# Altium PCB External_Board_1 mode.PcbDoc
Units mm, origin at the board's own origin, x right, y up, seen from the top; angles counter-clockwise.
Board outline 60.32 x 35.26 mm, 2 copper layers (Top Layer, Bottom Layer); 16 components, 8 nets, 69 pads, 1 vias.
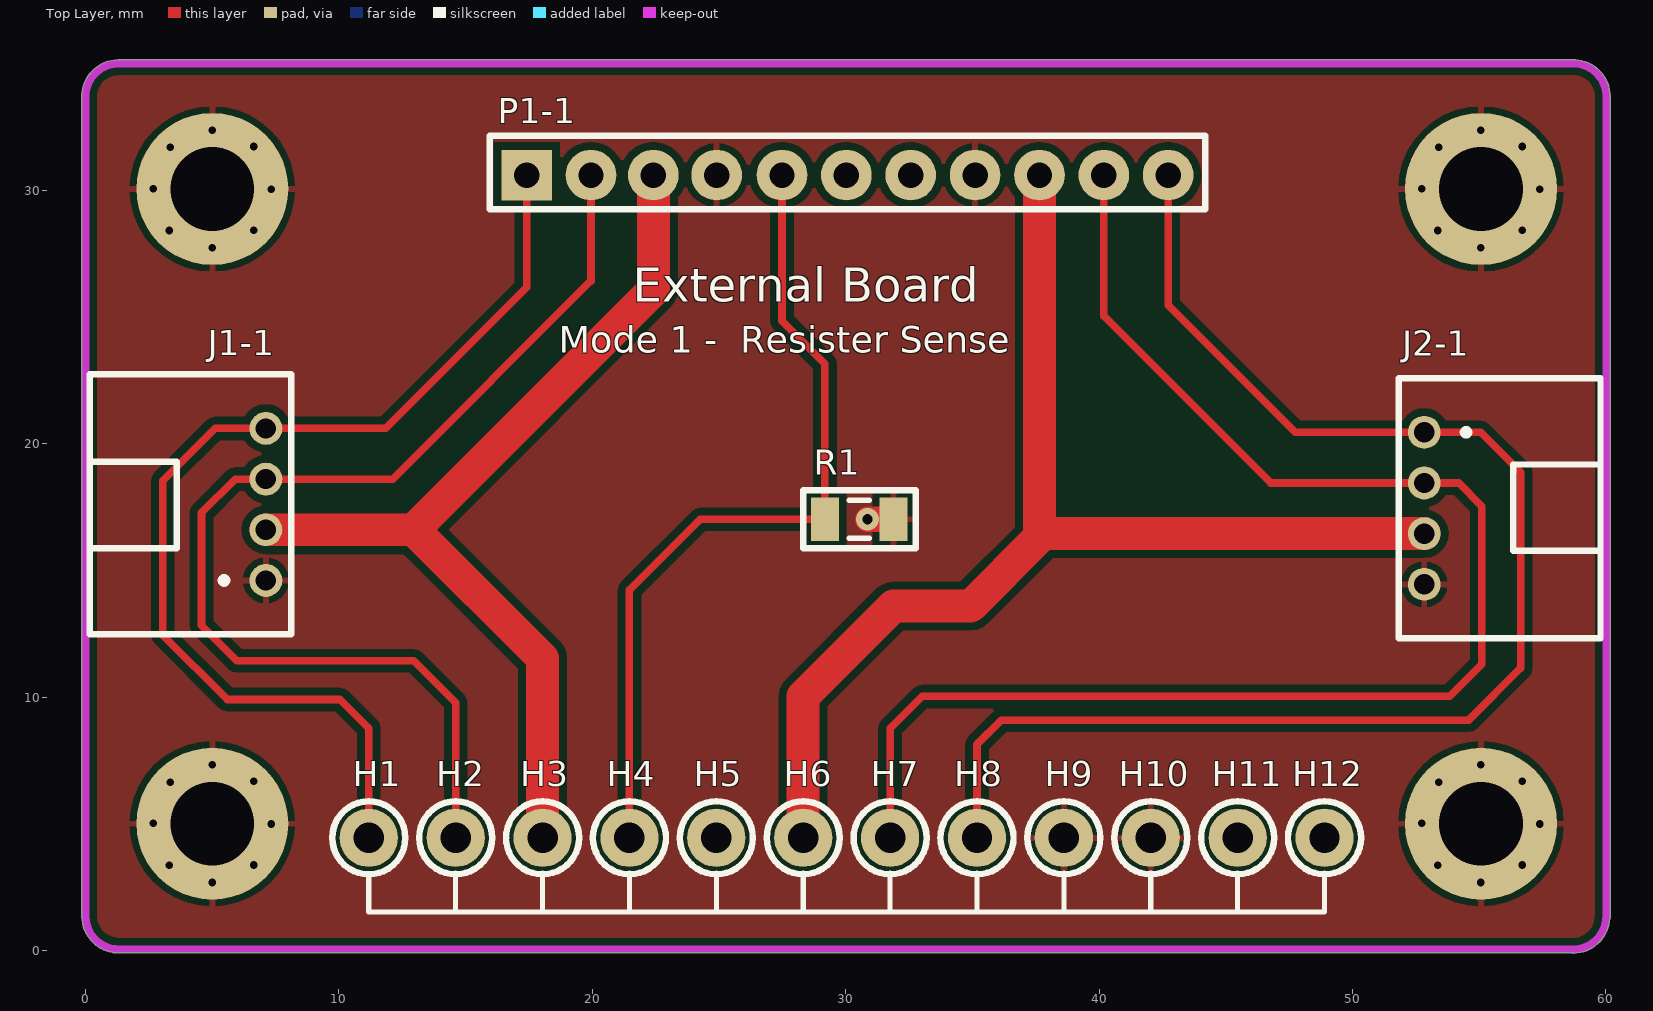
[diagram p0: Top Layer view]
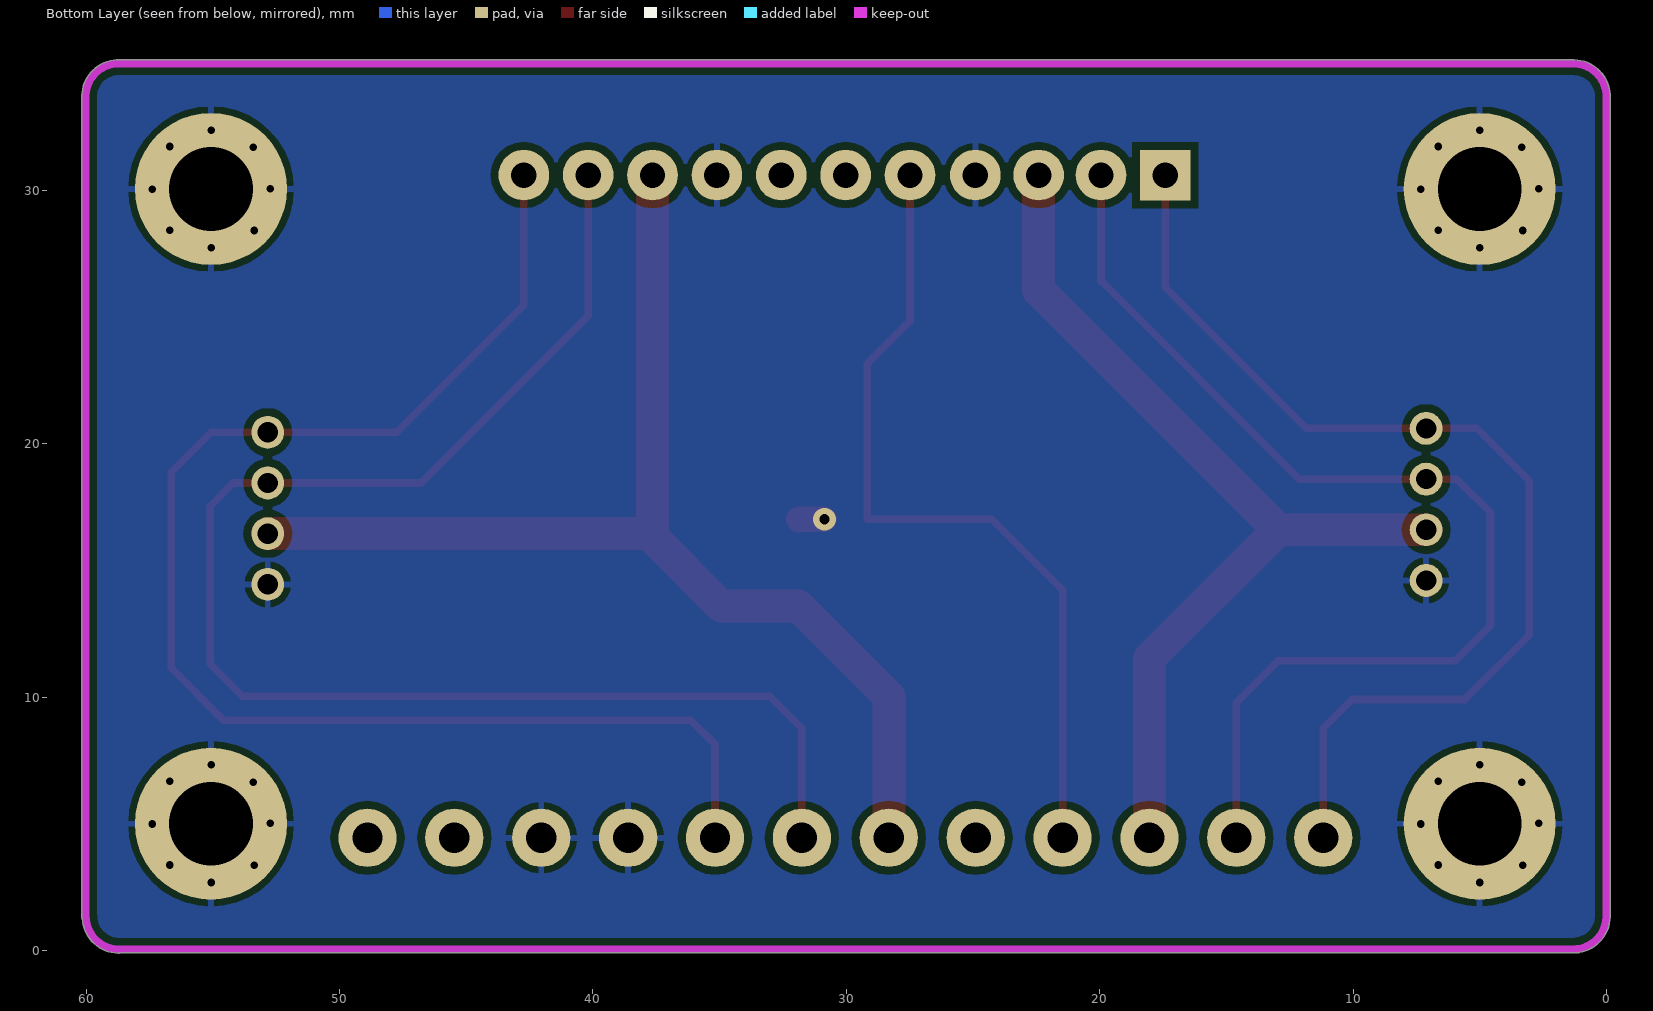
[diagram p1: Bottom Layer view, seen from below]
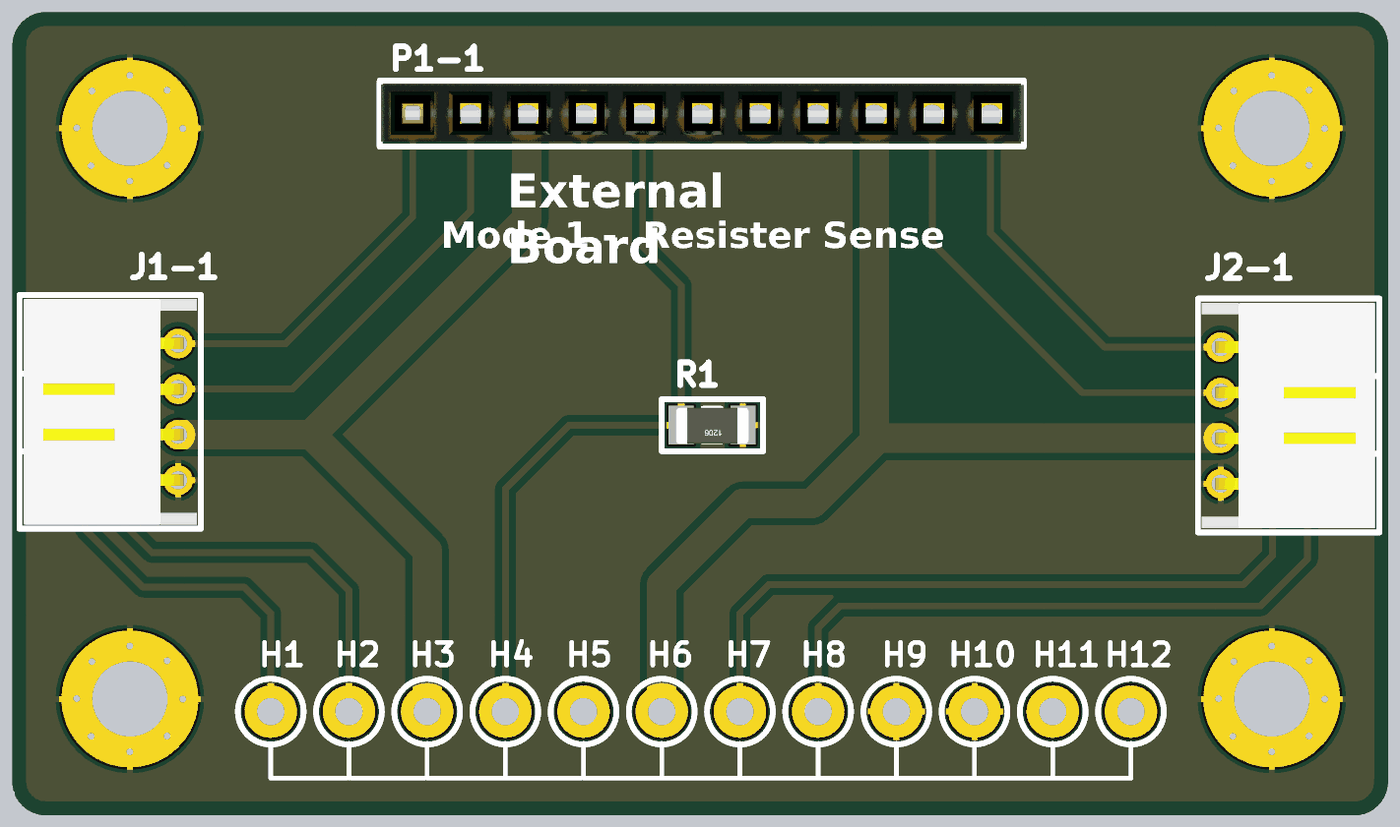
[diagram p2: 3D render of the assembled board from above, using the file's embedded part models]

## Layer stack, top to bottom
Top Solder: solder mask 0.0102, Solder Resist, Dk 3.5
Top Layer: signal copper 0.0356
Dielectric 1: dielectric 0.32, FR-4, Dk 4.8
Bottom Layer: signal copper 0.0356
Bottom Solder: solder mask 0.0102, Solder Resist, Dk 3.5

## Board outline
1.07,-0.079 ccw(c1.143,0.052) 1.143,-0.098 1.268,-0.098 ccw(c1.308,1.36) 1.347,-0.098 58.688,-0.098 ccw(c58.738,0.044) 58.742,-0.107 ccw(c58.7,1.351) 60.155,1.256 ccw(c60.019,1.319) 60.169,1.319 60.169,33.73 ccw(c60.019,33.73) 60.169,33.734 ccw(c58.711,33.693) 58.672,35.15 1.27,35.15 ccw(c1.27,35) 1.266,35.15 ccw(c1.308,33.692) -0.15,33.653 -0.15,1.322 ccw(c0,1.322) -0.15,1.318 ccw(c1.308,1.36)

## Design rules (kind name [scope] priority, off if disabled: settings)
Clearance Clearance_1 [inpoly] p1: gap=0.3
Clearance [All] p2: gap=0.203
HoleSize [All] p1: absolutevalues=TRUE maxlimit=8 minlimit=0.2 maxpercent=80.000 minpercent=20.000
HoleToHoleClearance [All] p1: gap=0.1 allowstackedmicrovias=TRUE
MinimumSolderMaskSliver [All] p1: minsoldermaskwidth=0.01
PlaneConnect [All] p1: planeconnectstyle=Relief reliefexpansion=0.254 reliefentries=4 reliefconductorwidth=0.254 reliefairgap=0.254
PolygonConnect PolygonConnect_1 [IsVia] p1: connectstyle=Direct reliefconductorwidth=0.254 reliefentries=4 polygonreliefangle="90 Angle" airgapwidth=0.254
PolygonConnect [All] p2: connectstyle=Relief reliefconductorwidth=0.254 reliefentries=4 polygonreliefangle="90 Angle" airgapwidth=0.254
RoutingVias [All] p1: holewidth=0.3 width=0.5 viastyle="Through Hole" minholewidth=0.3 minwidth=0.5 maxholewidth=0.711 maxwidth=1.27
SilkToSilkClearance [All] p1: silktosilkclearance=0.01
SilkToSolderMaskClearance [IsPad] p1: minsilkscreentomaskgap=0 clearancetoexposedcopper=TRUE
SolderMaskExpansion isvia [isvia] p1: expansion=0 soldermaskfromhole=TRUE
SolderMaskExpansion [All] p2: expansion=0.102
Width [All] p1: maxlimit=3 minlimit=0.3 preferedwidth=0.3
24 further rules are at their usual default settings.

## Components (designator, comment, footprint, x,y, rotation, side; value= is the part's Value field where it differs from the comment)
H1 "TP_HOLE" TestHole 11.176,4.445 r0 top
H2 "TP_HOLE" TestHole 14.605,4.445 r0 top
H3 "TP_HOLE" TestHole 18.034,4.445 r0 top
H4 "TP_HOLE" TestHole 21.463,4.445 r0 top
H5 "TP_HOLE" TestHole 24.892,4.445 r0 top
H6 "TP_HOLE" TestHole 28.321,4.445 r0 top
H7 "TP_HOLE" TestHole 31.75,4.445 r0 top
H8 "TP_HOLE" TestHole 35.179,4.445 r0 top
H9 "TP_HOLE" TestHole 38.608,4.445 r0 top
H10 "TP_HOLE" TestHole 42.037,4.445 r0 top
H11 "TP_HOLE" TestHole 45.466,4.445 r0 top
H12 "TP_HOLE" TestHole 48.895,4.445 r0 top
J1-1 "S4B-PH-K-S" CON4 7.112,14.605 r90 top
J2-1 "S4B-PH-K-S" CON4 52.832,20.447 r270 top locked
P1-1 "Header11" CON11 17.399,30.607 r0 top
R1 "PTFT1206L1501JV" PTFT1206L1501JV 31.877,17.018 r180 top

## Footprints (in the part's own frame and the unit in brackets; to place one, negate y for a bottom-side part, rotate by r counter-clockwise, add the part's x,y. Pads: shape width x height; smd on the part's side, far side on the other; paste and mask are expansions set on the pad)
CON4 [mm] "CONN HEADER PH SIDE 4POS 2MM"
  round 1.3 hole 0.8: 1(-0.002,-0.002) 2(1.998,-0.002) 3(3.998,-0.002) 4(5.998,-0.002)
  silkscreen extent -2.13,-1 8.13,6.95, body extent -1.95,-0.83 7.95,6.77, height 4.8
CON11 [mm] "CONN HEADR FMALE 11POS .1\" DL AU"
  rect 2x2 hole 1: 1(0.005,-0.007)
  round 2 hole 1: 2(2.545,-0.007) 3(5.005,-0.007) 4(7.505,-0.007) 5(10.085,-0.007) 6(12.625,-0.007) 7(15.165,-0.007) 8(17.705,-0.007) 9(20.245,-0.007) 10(22.785,-0.007) 11(25.325,-0.007)
  silkscreen extent -1.44,-1.36 26.8,1.54, body extent -1.4,-1.14 26.8,1.36, height 8.5
PTFT1206L1501JV [mm] "THERMISTOR PTC 1.5K OHM 5% 1206"
  rect 1.1x1.7 smd: 1(0,0) 2(2.7,0)
  silkscreen extent 0.95,-0.75 1.75,0.75, body extent -0.26,-0.78 2.94,0.82, height 1
TestHole [mm] "pad of test through hole"
  round 2.3 hole 1.2: 1(0,0)
  silkscreen extent -1.44,-1.44 1.44,1.44

## Part data
H1 H2 H3 H4 H5 H6 H7 H8 H9 H10 H11 H12: "TEST POINT HOLE"
J1-1 J2-1: library part "S4B-PH-K-S (LF)(SN)", "JST (JAPAN SOLDERLESS TERMINALS) - S4B-PH-K-S (LF)(SN) - CONNECTOR, HEADER, 2MM, 4 POSITION, 1ROW"
P1-1: library part SFH11-PBPC-D10-ST-BK, "CONN HEADR FMALE 20POS .1\" DL AU"
R1: "THERMISTOR PTC 1.5K OHM 5% 1206"

## Free pads (board coordinates)
  round 0.6 hole 0.3: 1(2.664,5.017) 1(2.664,30.069) 1(3.296,3.361) 1(3.296,28.413) 1(3.334,6.64) 1(3.334,31.692) 1(4.996,7.323) 1(4.996,32.375) 1(4.997,2.68) 1(4.997,27.732) 1(6.633,6.679) 1(6.633,31.731) 1(6.633,3.374) 1(6.633,28.426) 1(7.321,4.991) 1(7.321,30.043) 1(52.735,5.017) 1(52.735,30.069) 1(53.367,3.361) 1(53.367,28.413) 1(53.405,6.64) 1(53.405,31.692) 1(55.067,7.323) 1(55.067,32.375) 1(55.068,2.68) 1(55.068,27.732) 1(56.704,6.679) 1(56.704,31.731) 1(56.704,3.374) 1(56.704,28.426) 1(57.392,4.991) 1(57.392,30.043)
  round 6 hole 3.3: 1(5,5) 1(5,30.052) 1(55.071,5) 1(55.071,30.052)

## Via types
v1: diameter 0.9, hole 0.4, Top Layer to Bottom Layer, 1 vias

## Nets (pads, with @x,y where several pads share a name; then routed paths per layer and width w, separated by ;. In a path a pad name is that pad's centre, name@x,y a point inside that pad or via, vN(x,y) a via of type N, cw(c..) or ccw(c..) an arc to the next point about the centre after c; other vN are vias at no path point)
GND: H9.1 H10.1 J1-1.1 J2-1.4 P1-1.4 P1-1.8 pad.1 R1.1 | length 1
  Top Layer w1: v1(30.861,17.018) 31.834,17.018 31.855,16.996 R1.1
NetH4_1: H4.1 P1-1.5 R1.2 | length 32.9
  Top Layer w0.3: H4.1 21.463,14.224 24.257,17.018 R1.2 29.177,23.147 27.484,24.84 P1-1.5
SCL: H1.1 J1-1.4 P1-1.1 | length 42
  Top Layer w0.3: H1.1 11.176,8.763 10.033,9.906 5.588,9.906 3.048,12.446 3.048,18.542 5.109,20.603 J1-1.4 11.84,20.603 17.404,26.167 P1-1.1
SCL_2: H8.1 J2-1.1 P1-1.11 | length 55.9
  Top Layer w0.3: H8.1 35.179,8.128 36.134,9.083 54.577,9.083 56.642,11.149 56.642,18.865 55.057,20.449 J2-1.1 47.746,20.449 42.724,25.471 P1-1.11
SDA: H2.1 J1-1.3 P1-1.2 | length 44.4
  Top Layer w0.3: H2.1 14.605,9.779 12.954,11.43 5.969,11.43 4.572,12.827 4.572,17.272 5.903,18.603 J1-1.3 12.126,18.603 19.944,26.421 P1-1.2
SDA_2: H7.1 J2-1.2 P1-1.10 | length 58.6
  Top Layer w0.3: H7.1 31.75,8.763 33.013,10.026 53.836,10.026 55.107,11.297 55.107,17.53 54.187,18.449 J2-1.2 46.775,18.449 40.184,25.04 P1-1.10
VCC: H3.1 J1-1.2 P1-1.3 | length 38
  Top Layer w1.3: J1-1.2 12.954,16.603 ; H3.1 18.034,11.523 12.954,16.603 ; P1-1.3 22.404,26.053 12.954,16.603
VCC_2: H6.1 J2-1.3 P1-1.9 | length 46.8
  Top Layer w1.3: H6.1 28.321,10.033 31.877,13.589 34.925,13.589 37.644,16.308 ; P1-1.9 37.644,16.449 J2-1.3
pads on no net: H5.1 H11.1 H12.1 P1-1.6 P1-1.7

## Polygon pours and split planes (outlines as drawn)
GND on Top Layer "TOP_Layer" (solid, remove dead copper, pour order 14): -0.762,35.56 60.198,35.56 60.198,-0.508 60.325,-0.635 60.198,-0.762 -0.381,-0.762 -0.381,35.179 -0.762,35.56
GND on Bottom Layer "Bottom_Layer" (solid, remove dead copper, pour order 16): -0.762,35.56 60.325,35.56 60.325,-0.635 -0.635,-0.635 -0.635,35.433 -0.762,35.56

## Keep-outs
Keep-Out Layer:
  lines w0.3: 1.143,0.052 58.8,0.052 ; 1.345,0.052 cw(c1.308,1.36) 0,1.322 0,33.655 cw(c1.308,33.692) 1.27,35 58.674,35 cw(c58.711,33.693) 60.019,33.73 60.019,1.319 ; 58.738,0.044 ccw(c58.7,1.351) 60.008,1.389

## Silkscreen, mask and mechanical layers (free items; w line width, h text height)
Top Overlay:
  lines w0.203: 11.176,2.921 11.176,1.524 48.895,1.524 48.895,3.048 ; 14.605,1.524 14.605,3.048 ; 18.034,1.524 18.034,3.048 ; 21.463,1.524 21.463,3.048 ; 24.892,1.524 24.892,3.048 ; 28.321,1.524 28.321,3.048 ; 31.75,1.524 31.75,3.048 ; 35.179,1.524 35.179,3.048 ; 38.608,1.524 38.608,3.048 ; 42.037,1.524 42.037,3.048 ; 45.466,1.524 45.466,3.048
  lines w0.254: 28.321,15.875 32.766,15.875 32.766,18.161 28.321,18.161 28.321,15.875
  text "External Board" at 21.59,25.146 h2.3
  text "Mode 1 -  Resister Sense" at 18.669,23.241 h1.8